# EAGLE board FY (EAGLE 9.6.2)
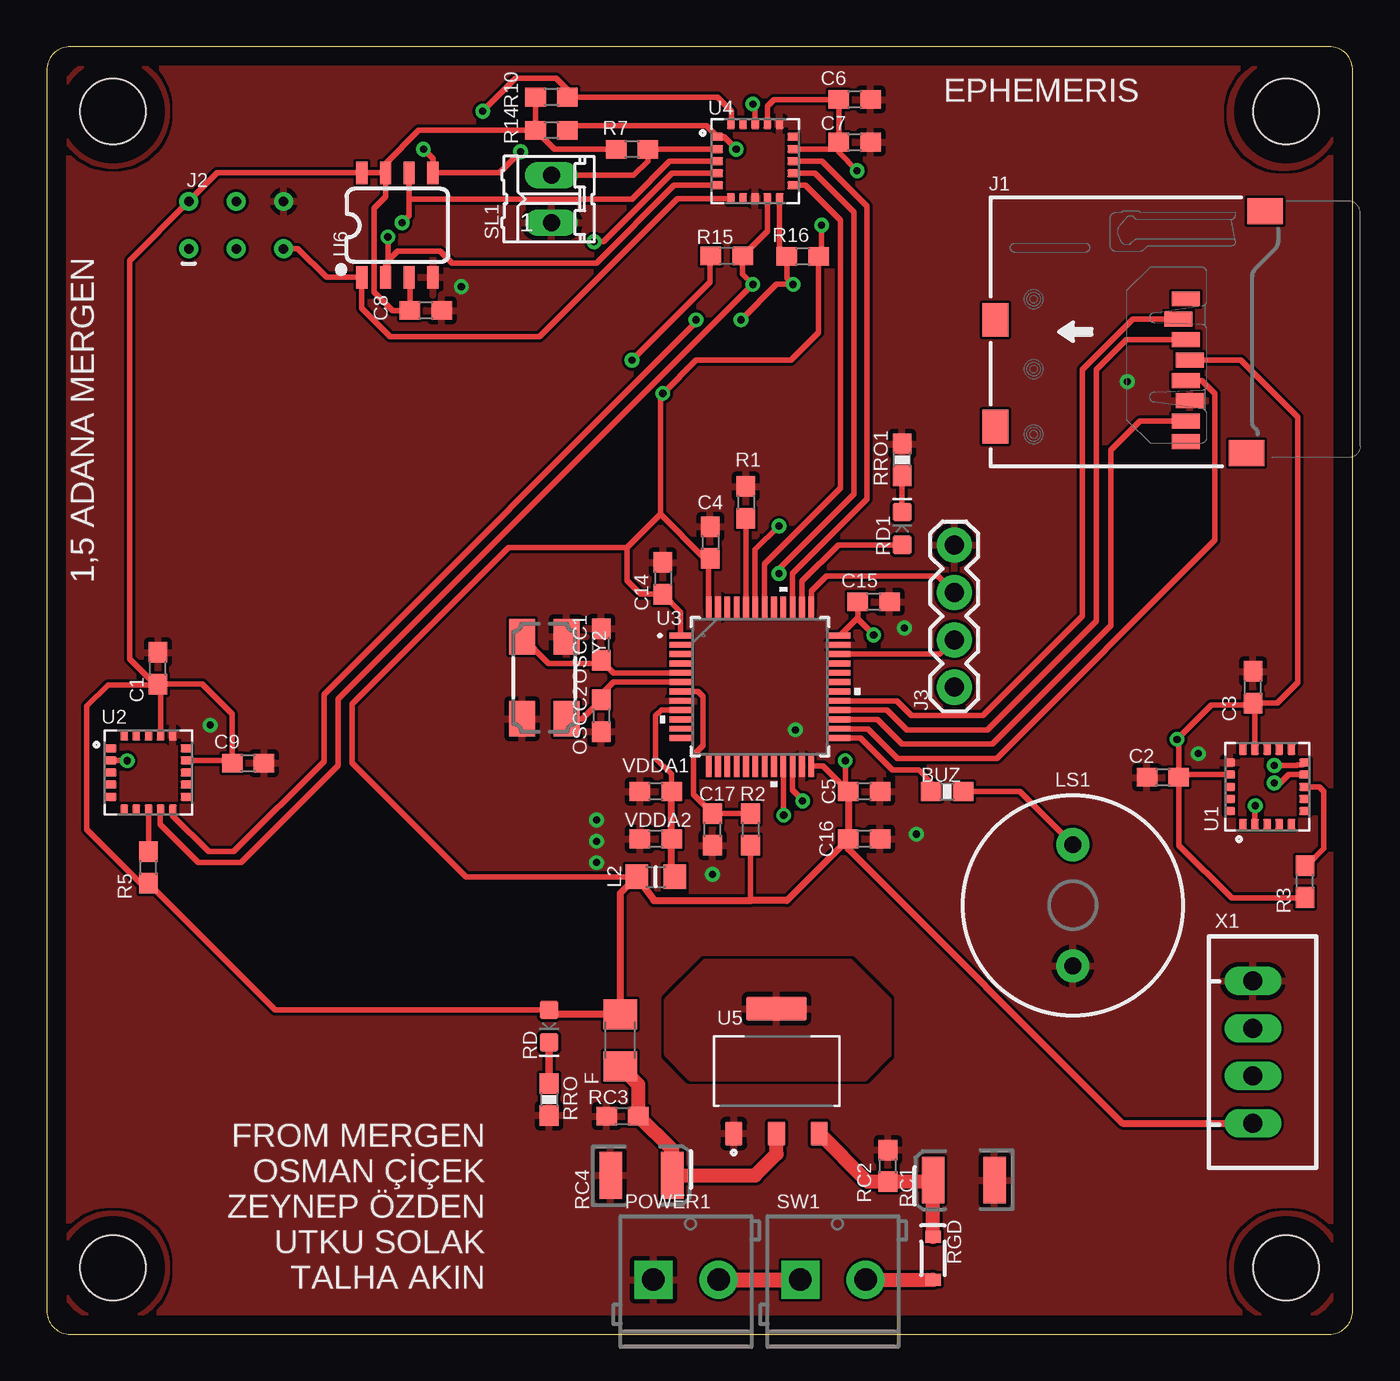
[diagram p0: board, top side]
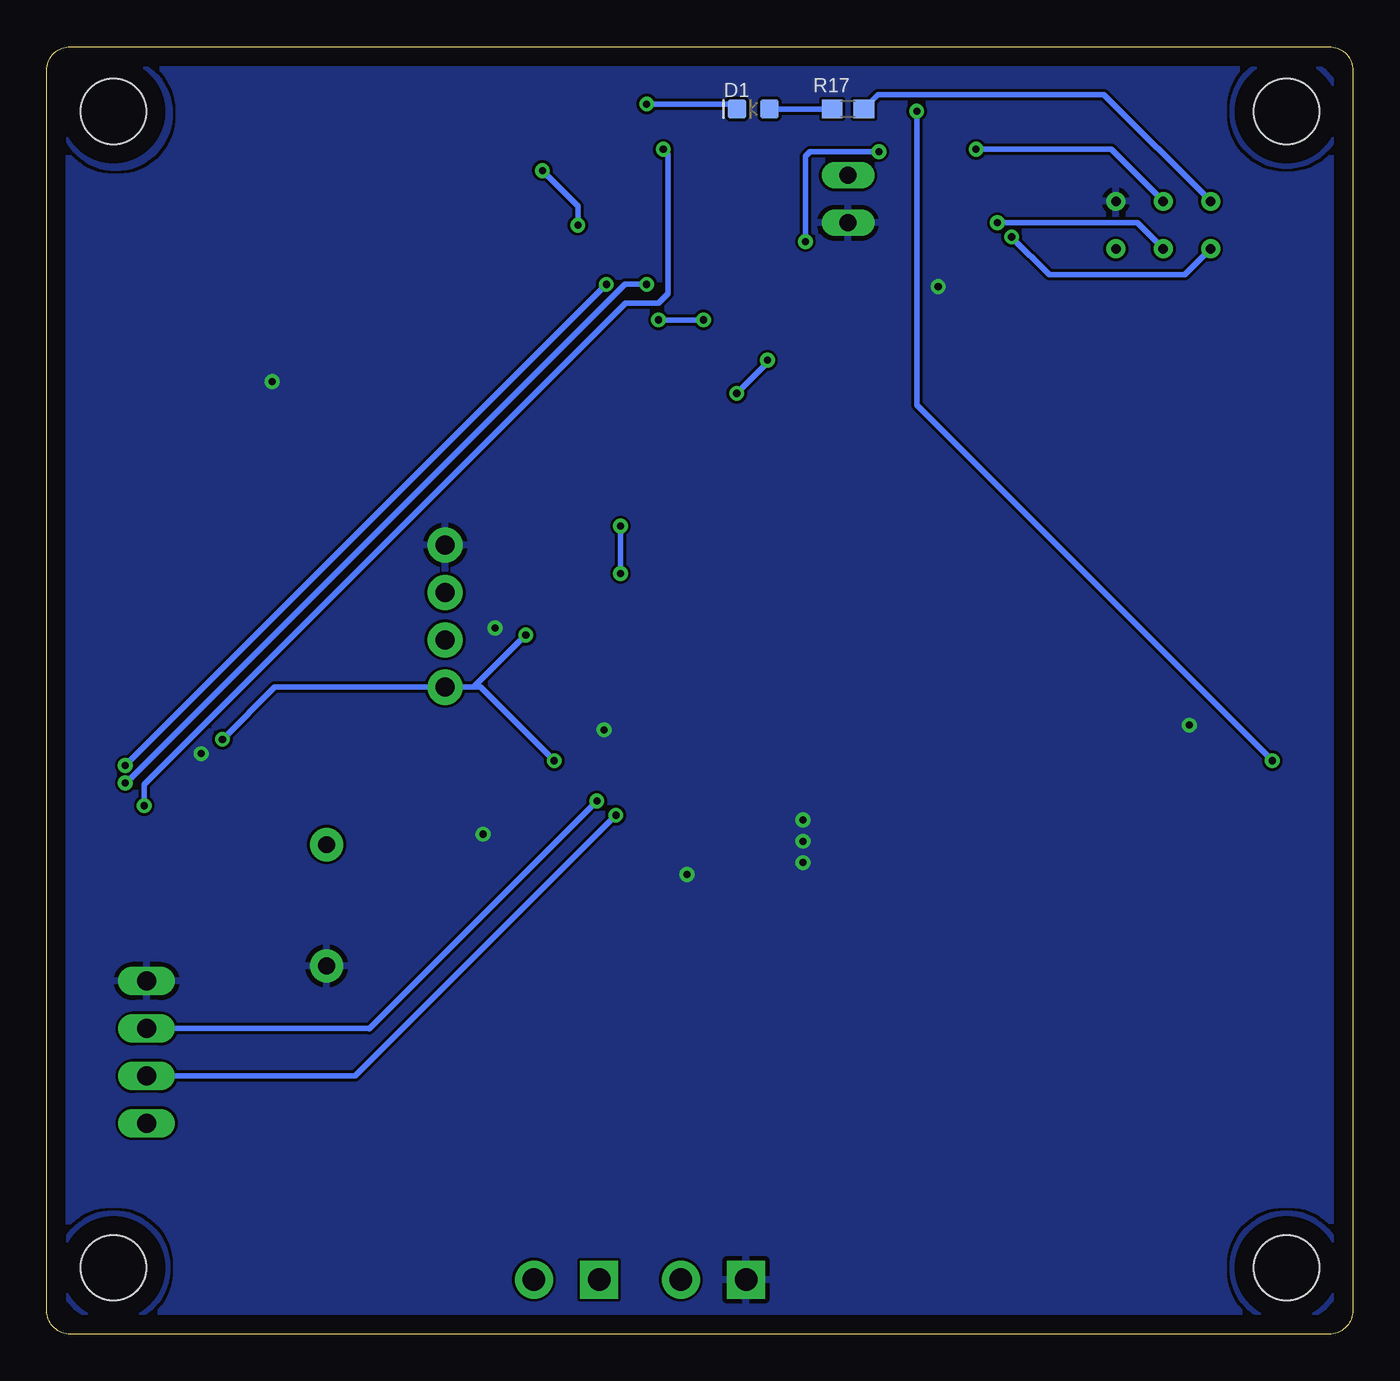
[diagram p1: board, bottom side, seen from below]

Size 70 x 69 mm. Coordinates in mm from the lower left corner, seen from the top.
Outline: 0,67.73 0,1.27 arc90 1.27,0 68.73,0 arc90 70,1.27 70,67.73 arc90 68.73,69 1.27,69 arc90 0,67.73
Copper layers (1*16): Top 0.035mm / dielectric 1.5mm / Bottom 0.035mm
Design rules "default": minimum track width 6mil, minimum drill 0.35mm, track to track 6mil, track to pad 6mil, pad to pad 6mil, via to via 6mil, smd to smd 6mil, copper to edge 40mil, drill to drill 6mil, minimum pad ring 10mil, minimum via ring 8mil, stop-mask expansion 4mil, vias tented up to drill 0mil, thermal gap 10mil
Net classes: 1 Power: width 0.305 mm
Holes 3.5 mm at 3.56,3.56 66.42,3.56 66.42,65.53 3.56,65.53

## Footprints (pad centres in the part's own frame; a part is rotated, then mirrored left to right if it is on the bottom)
0603-RES = smd 1.1 x 1: 1 -0.85,0; 2 0.85,0
0603 = smd 1.1 x 1: 1 -0.85,0; 2 0.85,0
LED-0603 = smd 1 x 1: A -0.877,0; C 0.877,0
1206 = smd 1.6 x 1.8: 1 -1.4,0; 2 1.4,0
CON-SD-CARD_2908-05 = smd 0.8 x 1.5: 1 1.761,3.847; 2 0.669,4.253; 3 -0.423,3.847; 4 -1.515,3.644; 5 -2.607,3.847; 6 -3.7,3.644; 7 -4.792,3.847; 8 -5.884,3.847 | smd 1.397 x 1.905: GND@1 -6.5,0.6; GND@2 6.473,-0.389 | smd 1.803 x 1.397: GND@3 0.631,14.059; GND@4 -5.084,14.059
2X3_TEST_POINTS = drill 0.508: 1 -2.54,-1.27; 2 -2.54,1.27; 3 0,-1.27; 4 0,1.27; 5 2.54,-1.27; 6 2.54,1.27
1X04 = drill 1.016 pad 1.88: 1 0,0; 2 2.54,0; 3 5.08,0; 4 7.62,0
RC-MASTER-SMD_L0805MP = smd 1.2 x 1.3: 1 -1.016,0; 2 1.016,0
BUZZER-12MM = drill 0.9 pad 1.778: + 3.25,0; - -3.25,0
SCREWTERMINAL-3.5MM-2-NS = drill 1.2 pad 2.032 square: 1 0,0 | drill 1.2 pad 2.032: 2 3.5,0
EIA3528 = smd 1.2 x 2.5: A 1.65,0; C -1.65,0
SOD-323 = smd 0.63 x 0.83: A 1.15,0; C -1.15,0
02P = drill 0.914 long: 1 -1.27,0; 2 1.27,0
PQFN65P470X450X270-20N = smd 0.59 x 0.43: 1 -2.01,1.3; 2 -2.01,0.65; 3 -2.01,0; 4 -2.01,-0.65; 5 -2.01,-1.3; 11 2.01,-1.3; 12 2.01,-0.65; 13 2.01,0; 14 2.01,0.65; 15 2.01,1.3 | smd 0.43 x 0.59: 6 -1.3,-2.01; 7 -0.65,-2.01; 8 0,-2.01; 9 0.65,-2.01; 10 1.3,-2.01; 16 1.3,2.01; 17 0.65,2.01; 18 0,2.01; 19 -0.65,2.01; 20 -1.3,2.01
LQFP48-7X7MM = smd 1.194 x 0.305: 1 -4.25,2.75; 2 -4.25,2.25; 3 -4.25,1.75; 4 -4.25,1.25; 5 -4.25,0.75; 6 -4.25,0.25; 7 -4.25,-0.25; 8 -4.25,-0.75; 9 -4.25,-1.25; 10 -4.25,-1.75; 11 -4.25,-2.25; 12 -4.25,-2.75; 25 4.25,-2.75; 26 4.25,-2.25; 27 4.25,-1.75; 28 4.25,-1.25; 29 4.25,-0.75; 30 4.25,-0.25; 31 4.25,0.25; 32 4.25,0.75; 33 4.25,1.25; 34 4.25,1.75; 35 4.25,2.25; 36 4.25,2.75 | smd 0.305 x 1.194: 13 -2.75,-4.25; 14 -2.25,-4.25; 15 -1.75,-4.25; 16 -1.25,-4.25; 17 -0.75,-4.25; 18 -0.25,-4.25; 19 0.25,-4.25; 20 0.75,-4.25; 21 1.25,-4.25; 22 1.75,-4.25; 23 2.25,-4.25; 24 2.75,-4.25; 37 2.75,4.25; 38 2.25,4.25; 39 1.75,4.25; 40 1.25,4.25; 41 0.75,4.25; 42 0.25,4.25; 43 -0.25,4.25; 44 -0.75,4.25; 45 -1.25,4.25; 46 -1.75,4.25; 47 -2.25,4.25; 48 -2.75,4.25
SOT229P700X180-4N = smd 0.93 x 1.31: 1 -2.29,-3.345; 2 0,-3.345; 3 2.29,-3.345 | smd 3.24 x 1.31: 4 0,3.345
SO08 = smd 0.6 x 1.2: 1 -1.905,-2.8; 2 -0.635,-2.8; 3 0.635,-2.8; 4 1.905,-2.8; 5 1.905,2.8; 6 0.635,2.8; 7 -0.635,2.8; 8 -1.905,2.8
JST-XH-04-PACKAGE-LONG-PAD = drill 1.016 long: 1 -3.81,0; 2 -1.27,0; 3 1.27,0; 4 3.81,0
OSCCC500X320X110-4N = smd 1.9 x 1.4: 1 -2.2,-1.2; 2 2.2,-1.2; 3 2.2,1.2; 4 -2.2,1.2

## Placement (x,y rotation side)
BUZ  22R  [0603-RES]  48.26,29.08 0 top
C1  1uF  [0603]  5.97,35.69 90 top
C2  1uF  [0603]  59.82,29.84 180 top
C3  100nF  [0603]  64.64,34.67 90 top
C4  100nF  [0603]  35.56,42.42 270 top
C5  100nF  [0603]  43.81,29.08 180 top
C6  1uF  [0603]  43.31,66.17 0 top
C7  100nF  [0603]  43.31,63.88 0 top
C8  1.0uF  [0603]  20.32,54.86 0 top
C9  100nF  [0603]  10.8,30.61 0 top
C14  100nF  [0603]  33.02,40.51 270 top
C15  100nF  [0603]  44.32,39.24 180 top
C16  4.7uF  [0603]  43.81,26.54 180 top
C17  0.1uF  [0603]  35.69,27.05 90 top
D1  GREEN  [LED-0603]  32.13,65.66 180 bottom
F  0.75A  [1206]  30.73,15.75 90 top
J1  CON-SD-CARD_MICROSD-2908-05  [CON-SD-CARD_2908-05]  64.9,53.72 90 top
J2  Flash Programming  [2X3_TEST_POINTS]  10.16,59.44 0 top
J3  [1X04]  48.64,34.67 90 top
L2  [RC-MASTER-SMD_L0805MP]  32.64,24.51 0 top
LS1  BUZZER-PTH  [BUZZER-12MM]  54.99,22.99 90 top
OSCC1  25pF  [0603]  29.72,36.96 90 top
OSCC2  25pF  [0603]  29.72,33.15 270 top
POWER1  [SCREWTERMINAL-3.5MM-2-NS]  32.51,2.92 0 top
R1  10k  [0603]  37.46,44.58 270 top
R2  10k  [0603]  37.72,27.05 270 top
R3  10k  [0603]  67.44,24.26 90 top
R5  10k  [0603]  5.46,25.02 90 top
R7  10k  [0603]  31.37,63.5 180 top
R10  10k  [0603]  27.05,66.29 180 top
R14  10k  [0603]  27.05,64.52 180 top
R15  10k  [0603]  36.45,57.78 180 top
R16  10k  [0603]  40.51,57.76 0 top
R17  330  [0603]  27.05,65.66 180 bottom
RC1  22uF  [EIA3528]  49.15,8.26 180 top
RC2  100nF  [0603]  45.09,9.02 90 top
RC3  100nF  [0603]  30.86,11.68 180 top
RC4  22uF  [EIA3528]  31.88,8.51 0 top
RD  Red  [LED-0603]  26.92,16.51 270 top
RD1  Red  [LED-0603]  45.85,43.18 90 top
RGD  1A/23V  [SOD-323]  47.5,4.06 270 top
RRO  1.5k  [0603-RES]  26.92,12.57 270 top
RRO1  1.5k  [0603-RES]  45.85,46.86 90 top
SL1  [02P]  27.05,60.83 90 top
SW1  [SCREWTERMINAL-3.5MM-2-NS]  40.39,2.92 0 top
U1  AS72652-BLGT  [PQFN65P470X450X270-20N]  65.41,29.34 90 top
U2  AS72653-BLGT  [PQFN65P470X450X270-20N]  5.46,30.1 0 top
U3  STM32F302C8T6  [LQFP48-7X7MM]  38.23,34.7 0 top
U4  AS72651-BLGT  [PQFN65P470X450X270-20N]  37.97,62.87 0 top
U5  AMS1117-3.3  [SOT229P700X180-4N]  39.12,14.1 0 top
U6  4MB Flash  [SO08]  18.8,59.44 0 top
VDDA1  1uF  [0603]  32.64,29.08 180 top
VDDA2  100nF  [0603]  32.64,26.54 180 top
X1  JST-XH-04-PIN-LONG-PAD  [JST-XH-04-PACKAGE-LONG-PAD]  64.64,15.11 270 top
Y2  ABM2B-8.000MHZ-10-1-U-T  [OSCCC500X320X110-4N]  26.67,35.18 270 top

## Library data of the parts
BUZ RRO RRO1 = SparkFun-Resistors; PROD_ID: RES-08296
C1 C2 C6 = SparkFun-Capacitors; PROD_ID: CAP-11015
C3 C7 C9 OSCC1 OSCC2 RC2 RC3 VDDA1 VDDA2 = SparkFun-Capacitors; PROD_ID: CAP-00810
C4 C5 C14-C17 = SparkFun-Capacitors; PROD_ID: CAP-07876
C8 = SparkFun-Capacitors; PROD_ID: CAP-00868
D1 = SparkFun-LED; PROD_ID: DIO-00821
F = SparkFun-Fuses; PROD_ID: RES-11150
J1 = 52101-101-REV-A_v16
J2 = SparkFun-Connectors
J3 = SparkFun-Connectors; PROD_ID: CONN-09696
L2 = 52101-101-REV-A_v16; ORDER_URL: https://eu.mouser.com/ProductDetail/Murata-Electronics/NFZ15SR152SN10D?qs=rkhjVJ6%2F3EK7NITaH%252B9%252Bxg%3D%3D
LS1 = SparkFun-Electromechanical; PROD_ID: COMP-08253; SF_SKU: COM-07950
POWER1 SW1 = SparkFun-Connectors; PROD_ID: CONN-08399
R1-R3 R5 = SparkFun-Resistors; PROD_ID: RES-12535
R7 R10 R14-R17 = SparkFun-Resistors; PROD_ID: RES-00824
RC1 RC4 = SparkFun-Capacitors; PROD_ID: CAP-08063
RD RD1 = SparkFun-LED; PROD_ID: DIO-11154
RGD = SparkFun-DiscreteSemi; PROD_ID: DIO-11623
SL1 = con-amp-quick; OC_FARNELL: unknown; OC_NEWARK: unknown
U1 U2 U4 = AS7265X-BLGT; AVAILABILITY: Warning; DESCRIPTION: AS72651-BLGT LGA20 LF T&RDP; MF: ams; MP: AS72651-BLGT; PACKAGE: LGA-20 ams; PRICE: None
U3 = STM32F302C8T6; BUILT_BY: EMA_UL_Team; COPYRIGHT: Copyright (C) 2018 Accelerated Designs. All rights reserved; MANUFACTURER_PART_NUMBER: STM32F302C8T6; SOURCELIBRARY: Updates_to_database_2020-10-19; VENDOR: STMicroelectronics
U5 = AMS1117-3.3; AVAILABILITY: Unavailable; DESCRIPTION: Sot223/Pkg 1-Amp 3.3-Volt Low Drop Out Voltage Regulatator; MF: Advanced Monolithic Systems; MP: AMS1117-3.3; PACKAGE: SOT-89 ams; PRICE: None
U6 = SparkFun-IC-Memory; ORDER_URL: https://eu.mouser.com/ProductDetail/Adesto-Technologies/AT25SF041B-SHB-T?qs=wnTfsH77Xs7aj0PSgtTkzg%3D%3D; PROD_ID: IC-12455
X1 = Rembrandt Electronics - JST XH Connectors v1-0
Y2 = ABM3B-26.000MHZ-10-1-U-T; AVAILABILITY: Good; DESCRIPTION: 26MHz ±10ppm Crystal 10pF 50 Ohms 4-SMD, No Lead; MF: Abracon; MP: ABM3B-26.000MHZ-10-1-U-T; PACKAGE: SMD-4 Abracon LLC; PRICE: None; PURCHASE-URL: https://pricing.snapeda.com/search/part/ABM3B-26.000MHZ-10-1-U-T/?ref=eda

## Nets
3.3V [Power]: C1.1 C2.1 C3.1 C4.2 C5.2 C6.1 C7.1 C8.1 C9.1 C14.2 C15.2 C16.2 F.2 J1.4 J2.2 J3.1 L2.1 R2.2 R3.1 R5.1 R7.2 R10.2 R14.2 R15.2 R16.2 R17.1 RD.A U1.14 U1.17 U2.14 U2.17 U3.1 U3.24 U3.36 U3.48 U4.14 U4.17 U6.3 U6.7 U6.8 X1.4
BT0: R1.2 U3.44
BUZZER: BUZ.1 U3.25
CMISO: J2.1 U4.5 U6.2
CMOSI: J2.4 U4.4 U6.5
CS: J1.2 U3.29
CSCK: J2.3 U4.3 U6.6
CSN_EE: J2.5 U4.6 U6.1
GND: C1.2 C2.2 C3.2 C4.1 C5.1 C6.2 C7.2 C8.2 C9.2 C14.1 C15.1 C16.1 C17.1 J1.6 J2.6 J3.4 LS1.- OSCC1.2 OSCC2.2 POWER1.1 R1.1 RC1.C RC2.2 RC3.2 RC4.C RRO1.2 RRO.2 SL1.1 U1.16 U2.16 U3.8 U3.23 U3.35 U3.47 U4.8 U4.16 U5.1 U6.4 VDDA1.2 VDDA2.2 X1.1 Y2.2 Y2.4
HT: U5.4
INT: U3.39 U4.13
LED: RD1.A U3.38
LED_IND: D1.C U4.18
MISO: J1.7 U3.27
MOSI: J1.3 U3.28
N$1: R3.2 U1.8
N$2: RD1.C RRO1.1
N$3: POWER1.2 SW1.1
N$5: R5.2 U2.8
N$6: F.1 RC3.1 RC4.A U5.2
N$11: RD.C RRO.1
N$13: BUZ.2 LS1.+
N$14: D1.A R17.2
NRST: C17.2 R2.1 U3.7
OSC_IN: OSCC1.1 U3.5 Y2.1
OSC_OUT: OSCC2.1 U3.6 Y2.3
RESN: R7.1 SL1.2 U4.2
RX_S: U3.42 U4.11
RX_T: U3.21 X1.3
SCK: J1.5 U3.26
SCL_M: R15.1 U1.9 U2.9 U4.9
SDA_M: R16.1 U1.10 U2.10 U4.10
SLV1_R: R14.1 U1.2 U4.1
SLV2_R: R10.1 U2.2 U4.20
SWCLK: J3.3 U3.37
SWDIO: J3.2 U3.34
TX_S: U3.43 U4.12
TX_T: U3.22 X1.2
VDDA: L2.2 U3.9 VDDA1.1 VDDA2.1
VIN: RGD.A SW1.2
VNR: RC1.A RC2.1 RGD.C U5.3

## Tracks (layer width: path | path; a pad name or v marks a point on that pad's centre or on a via)
3.3V  (via drill 0.38)
  Top 0.305: U2.14 9.8,30.75 C9.1 9.95,33.23 8.34,34.84 C1.1 6.01,34.8 | U2.17 6.11,34.7 6.01,34.8 | 64.75,33.71 C3.1 65.95,33.82 67.06,34.92 67.06,49.15 64,52.21 J1.4 | 64.75,33.71 U1.14 | U1.17 60.81,29.99 C2.1 | U4.17 38.62,65.8 38.99,66.17 C6.1 C7.1 | RD.A 12.24,17.39 R5.1 5.04,24.17 2.16,27.05 2.16,33.65 3.3,34.8 5.84,34.8 | R2.2 37.72,23.24 | U3.36 42.5,37.45 43.47,38.42 C15.2 43.47,38.31 v44.32,37.46 | U3.24 41.6,30.45 C5.2 | U6.3 19.47,56.6 C8.1 18.54,54.86 17.56,55.85 17.56,60.35 18.16,60.96 U6.7 | R14.2 27.22,63.5 R7.2 | R10.2 R14.2 | C2.1 60.67,31.79 v60.58,31.88 62.41,33.71 64.75,33.71 | C2.1 60.67,26.2 63.5,23.37 67.4,23.37 R3.1 | L2.1 22.48,24.51 16.38,30.61 16.38,33.78 24.77,42.16 31.12,42.16 | 32.89,43.94 32.89,50.29 v33.02,50.42 34.8,52.2 39.88,52.2 41.36,53.68 R16.2 41.53,57.93 v41.53,59.44 | v31.37,52.2 35.56,56.39 35.56,57.75 R15.2 | U6.7 U6.8 9.15,62.24 J2.2 4.45,57.53 4.45,36.2 5.84,34.8 | U6.7 18.16,62.74 19.94,64.52 R14.2 | 5.84,34.8 6.01,34.8 | v42.8,30.73 42.8,29 42.96,28.83 | 31.12,42.16 32.89,43.94 | U3.48 35.48,41.48 C4.2 35.27,41.57 32.89,43.94 | U3.1 33.98,38.71 C14.2 31.84,39.66 31.12,40.39 31.12,42.16 | U4.14 42.09,63.51 C7.1 | v43.43,62.36 42.46,63.33 C7.1
  Top 0.381: RD.A 27.16,17.15 F.2 30.73,23.62 L2.1 32.54,23.24 37.72,23.24 39.66,23.24 C16.2 | C5.2 42.96,28.83 C16.2 | C16.2 42.96,26 57.66,11.3 X1.4
  Bottom 0.305: J3.1 57.78,34.67 v60.58,31.88 | v33.02,50.42 31.37,52.07 v31.37,52.2 | v41.53,59.44 41.53,60.45 v43.43,62.36 | J2.2 13.33,66.42 25.44,66.42 R17.1 | J3.1 47.12,34.67 v44.32,37.46 | J3.1 46.74,34.67 v42.8,30.73
BT0
  Top 0.305: R1.2 37.48,43.71 U3.44
BUZZER
  Top 0.305: U3.25 43.62,31.95 45.34,30.23 46.74,30.23 47.41,29.55 BUZ.1
CMISO  (via drill 0.38)
  Top 0.305: U4.5 33.62,61.56 29.46,57.4 21.72,57.4 21.08,58.04 18.8,58.04 18.16,57.4 U6.2 18.29,56.76 v18.29,58.8
  Bottom 0.305: J2.1 9.02,56.77 16.26,56.77 v18.29,58.8
CMOSI  (via drill 0.38)
  Top 0.305: v20.19,63.5 20.7,62.99 U6.5 24.26,62.24 v25.4,63.37 | v29.34,58.55 29.83,58.55 33.52,62.23 35.95,62.23 U4.4
  Bottom 0.305: J2.4 12.95,63.5 v20.19,63.5 | v25.4,63.37 29.08,63.37 29.34,63.12 v29.34,58.55
CS
  Top 0.305: J1.2 58.2,54.39 55.5,51.69 55.5,38.48 50.16,33.15 46.35,33.15 45.56,33.95 U3.29
CSCK  (via drill 0.38)
  Top 0.305: U4.3 33.39,62.86 31.36,60.83 19.43,60.83 | 19.43,60.83 U6.6 | v19.05,59.56 19.43,59.94 19.43,60.83
  Bottom 0.305: J2.3 11.56,59.56 v19.05,59.56
CSN_EE
  Top 0.305: U4.6 33.81,60.86 26.42,53.47 18.41,53.47 16.89,54.99 U6.1 14.99,56.64 13.46,58.17 J2.5
GND  (via drill 0.38)
  other vias: 57.91,51.05 61.72,31.11 8.76,32.64 22.22,56.13 35.69,24.64 29.46,27.56 29.46,26.42 29.46,25.27 46.61,26.8 40.13,32.38 45.97,37.85
  pour Top (rank 2): -0.25,69.22 -0.25,-0.25 70.23,-0.25 70.23,69.22
  pour Bottom (rank 2): -0.51,69.34 -0.51,-0.64 70.36,-0.64 70.36,69.34
HT
  pour Top: 35.31,19.94 43.05,19.94 45.09,17.91 45.09,14.99 43.81,13.72 34.54,13.72 33.27,14.99 33.27,17.91
  pour Top: 6.55,65.53 6.55,65.56 arc90 3.58,68.53 3.53,68.53 arc90 0.56,65.56 0.56,65.53 arc90 3.56,62.53 arc90
HT1
  pour Bottom: 0.56,65.53 0.56,65.56 arc-90 3.53,68.53 3.58,68.53 arc-90 6.55,65.56 6.55,65.53 arc-90 3.56,62.53 arc-90
HT2
  pour Top: 69.29,65.41 69.29,65.43 arc90 66.32,68.4 66.27,68.4 arc90 63.3,65.43 63.3,65.41 arc90 66.29,62.41 arc90
HT3
  pour Bottom: 63.3,65.41 63.3,65.43 arc-90 66.27,68.4 66.32,68.4 arc-90 69.29,65.43 69.29,65.41 arc-90 66.29,62.41 arc-90
HT4
  pour Top: 69.29,65.41 69.29,65.43 arc90 66.32,68.4 66.27,68.4 arc90 63.3,65.43 63.3,65.41 arc90 66.29,62.41 arc90
HT5
  pour Bottom: 63.3,65.41 63.3,65.43 arc-90 66.27,68.4 66.32,68.4 arc-90 69.29,65.43 69.29,65.41 arc-90 66.29,62.41 arc-90
HT6
  pour Top: 6.55,3.56 6.55,3.58 arc90 3.58,6.55 3.53,6.55 arc90 0.56,3.58 0.56,3.56 arc90 3.56,0.56 arc90
HT7
  pour Bottom: 0.56,3.56 0.56,3.58 arc-90 3.53,6.55 3.58,6.55 arc-90 6.55,3.58 6.55,3.56 arc-90 3.56,0.56 arc-90
  pour Bottom: 0.56,65.53 0.56,65.56 arc-90 3.53,68.53 3.58,68.53 arc-90 6.55,65.56 6.55,65.53 arc-90 3.56,62.53 arc-90
HT8
  pour Top: 6.55,3.56 6.55,3.58 arc90 3.58,6.55 3.53,6.55 arc90 0.56,3.58 0.56,3.56 arc90 3.56,0.56 arc90
HT9
  pour Bottom: 0.56,3.56 0.56,3.58 arc-90 3.53,6.55 3.58,6.55 arc-90 6.55,3.58 6.55,3.56 arc-90 3.56,0.56 arc-90
  pour Bottom: 63.3,65.41 63.3,65.43 arc-90 66.27,68.4 66.32,68.4 arc-90 69.29,65.43 69.29,65.41 arc-90 66.29,62.41 arc-90
HT10
  pour Top: 69.42,3.56 69.42,3.58 arc90 66.45,6.55 66.4,6.55 arc90 63.42,3.58 63.42,3.56 arc90 66.42,0.56 arc90
HT11
  pour Bottom: 63.42,3.56 63.42,3.58 arc-90 66.4,6.55 66.45,6.55 arc-90 69.42,3.58 69.42,3.56 arc-90 66.42,0.56 arc-90
HT12
  pour Top: 69.42,3.56 69.42,3.58 arc90 66.45,6.55 66.4,6.55 arc90 63.42,3.58 63.42,3.56 arc90 66.42,0.56 arc90
HT13
  pour Bottom: 63.42,3.56 63.42,3.58 arc-90 66.4,6.55 66.45,6.55 arc-90 69.42,3.58 69.42,3.56 arc-90 66.42,0.56 arc-90
INT
  Top 0.305: U4.13 41.55,62.86 43.97,60.45 43.97,44.76 39.98,40.77 U3.39
LED
  Top 0.305: U3.38 40.48,40.35 42.43,42.3 RD1.A
LED_IND  (via drill 0.38)
  Top 0.305: U4.18 37.97,65.8 v37.85,65.92
  Bottom 0.305: D1.C 33.27,65.92 v37.85,65.92
MISO
  Top 0.305: J1.7 58.58,48.93 57.02,47.37 57.02,37.97 50.67,31.62 45.85,31.62 44.52,32.95 U3.27
MOSI
  Top 0.305: J1.3 57.87,53.3 56.26,51.69 56.26,38.23 50.42,32.38 46.1,32.38 45.04,33.45 U3.28
N$1
  Top 0.305: U1.8 68.2,29.34 68.45,29.08 68.45,26.04 67.53,25.11 R3.2
N$2
  Top 0.305: RD1.C RRO1.1
N$3
  Top 0.813: POWER1.2 SW1.1
N$5
  Top 0.305: U2.8 R5.2
N$6
  Top 0.762: U5.2 39.12,9.65 37.97,8.51 RC4.A 33.53,9.87 RC3.1 31.71,13.37 F.1
N$11
  Top 0.406: RD.C RRO.1
N$13
  Top 0.305: BUZ.2 52.14,29.08 LS1.+
N$14
  Bottom 0.305: D1.A R17.2
NRST
  Top 0.305: R2.1 C17.2 34.67,28.92 34.67,31.04 35.18,31.55 35.18,34.16 34.9,34.45 U3.7
OSC_IN
  Top 0.305: Y2.1 26.91,35.94 29.55,35.94 OSCC1.1 30.38,35.45 U3.5
OSC_OUT
  Top 0.305: Y2.3 28.7,32.98 OSCC2.1 29.72,34.29 30.37,34.95 U3.6
RESN
  Top 0.305: U4.2 32.23,63.51 R7.1 32.22,62.87 31.46,62.1 SL1.2
RX_S
  Top 0.305: U4.11 40.67,61.56 42.55,59.69 42.55,45.34 38.48,41.27 U3.42
RX_T  (via drill 0.38)
  Top 0.305: v39.5,27.81 39.48,27.83 U3.21
  Bottom 0.305: X1.3 53.47,13.84 v39.5,27.81
SCK
  Top 0.305: J1.5 61.92,51.11 62.61,50.42 62.61,42.54 50.93,30.86 45.59,30.86 44.01,32.45 U3.26
SCL_M  (via drill 0.38)
  Top 0.305: U4.9 38.62,59.11 R15.1 37.3,56.81 v37.85,56.26 15.62,34.04 15.62,30.48 10.41,25.27 8.13,25.27 6.1,27.3 6.1,28.07 U2.9 | U1.9 66.56,29.99 66.12,29.54 v65.79,29.54
  Bottom 0.305: v65.79,29.54 65.55,29.78 65.5,29.78 39.02,56.26 v37.85,56.26
SDA_M  (via drill 0.38)
  Top 0.305: U4.10 39.27,58.15 R16.1 39.66,56.6 v40.01,56.26 39.12,56.26 v37.21,54.36 | U1.10 67.28,30.51 67.03,30.51 67,30.48 v65.79,30.48 | U2.10 6.76,27.78 8.69,25.86 10.03,25.86 14.86,30.68 14.86,34.29 34.8,54.23 v34.8,54.36
  Bottom 0.305: v65.79,30.48 v40.01,56.26 | v37.21,54.36 v34.8,54.36
SLV1_R  (via drill 0.38)
  Top 0.305: R14.1 28.15,64.77 35.36,64.77 U4.1 36.29,64.17 v36.96,63.5 | U1.2 64.75,28.31 v64.77,28.32
  Bottom 0.305: v64.77,28.32 64.77,29.46 38.99,55.24 37.21,55.24 36.7,55.75 36.7,63.25 v36.96,63.5
SLV2_R  (via drill 0.38)
  Top 0.305: U4.20 36.7,64.91 36.7,65.53 35.94,66.29 R10.1 27.9,66.71 27.3,67.31 25.14,67.31 v23.37,65.54 | U2.2 4.3,30.75 v4.32,30.73
  Bottom 0.305: v4.32,30.73 23.37,49.78 v23.37,65.54
SWCLK
  Top 0.305: U3.37 40.98,39.83 41.78,40.64 47.75,40.64 J3.3
SWDIO
  Top 0.305: U3.34 47.88,36.45 J3.2
TX_S  (via drill 0.38)
  Top 0.305: U4.12 41.18,62.21 43.26,60.13 43.26,45.02 39.24,41.01 v39.24,40.77 | U3.43 37.97,42.04 v39.24,43.31
  Bottom 0.305: v39.24,43.31 v39.24,40.77
TX_T  (via drill 0.38)
  Top 0.305: v40.51,28.57 40.51,28.63 39.98,29.16 U3.22
  Bottom 0.305: v40.51,28.57 52.72,16.37 52.74,16.38 X1.2
VDDA
  Top 0.305: VDDA1.1 33.49,30.01 32.64,30.86 32.64,33.15 32.94,33.45 U3.9
  Top 0.381: L2.2 33.49,24.71 VDDA2.1 VDDA1.1
VIN
  Top 0.762: SW1.2 RGD.A
VNR
  Top 0.762: RGD.C RC1.A 47.41,8.17 RC2.1 43.99,8.17 U5.3

## Text on the board
tPlace: EPHEMERIS | 1,5 ADANA MERGEN | FROM MERGEN / OSMAN ÇİÇEK / ZEYNEP ÖZDEN / UTKU SOLAK / TALHA AKIN